# Altium PCB E1811SENSE_1.PcbDoc
Units mil, origin at the board's own origin, x right, y up, seen from the top; angles counter-clockwise.
Board outline 900 x 1630 mil, 2 copper layers (Top Layer, Bottom Layer); 43 components, 42 nets, 170 pads, 67 vias.
Unrouted connection lines stored in the file: 1.
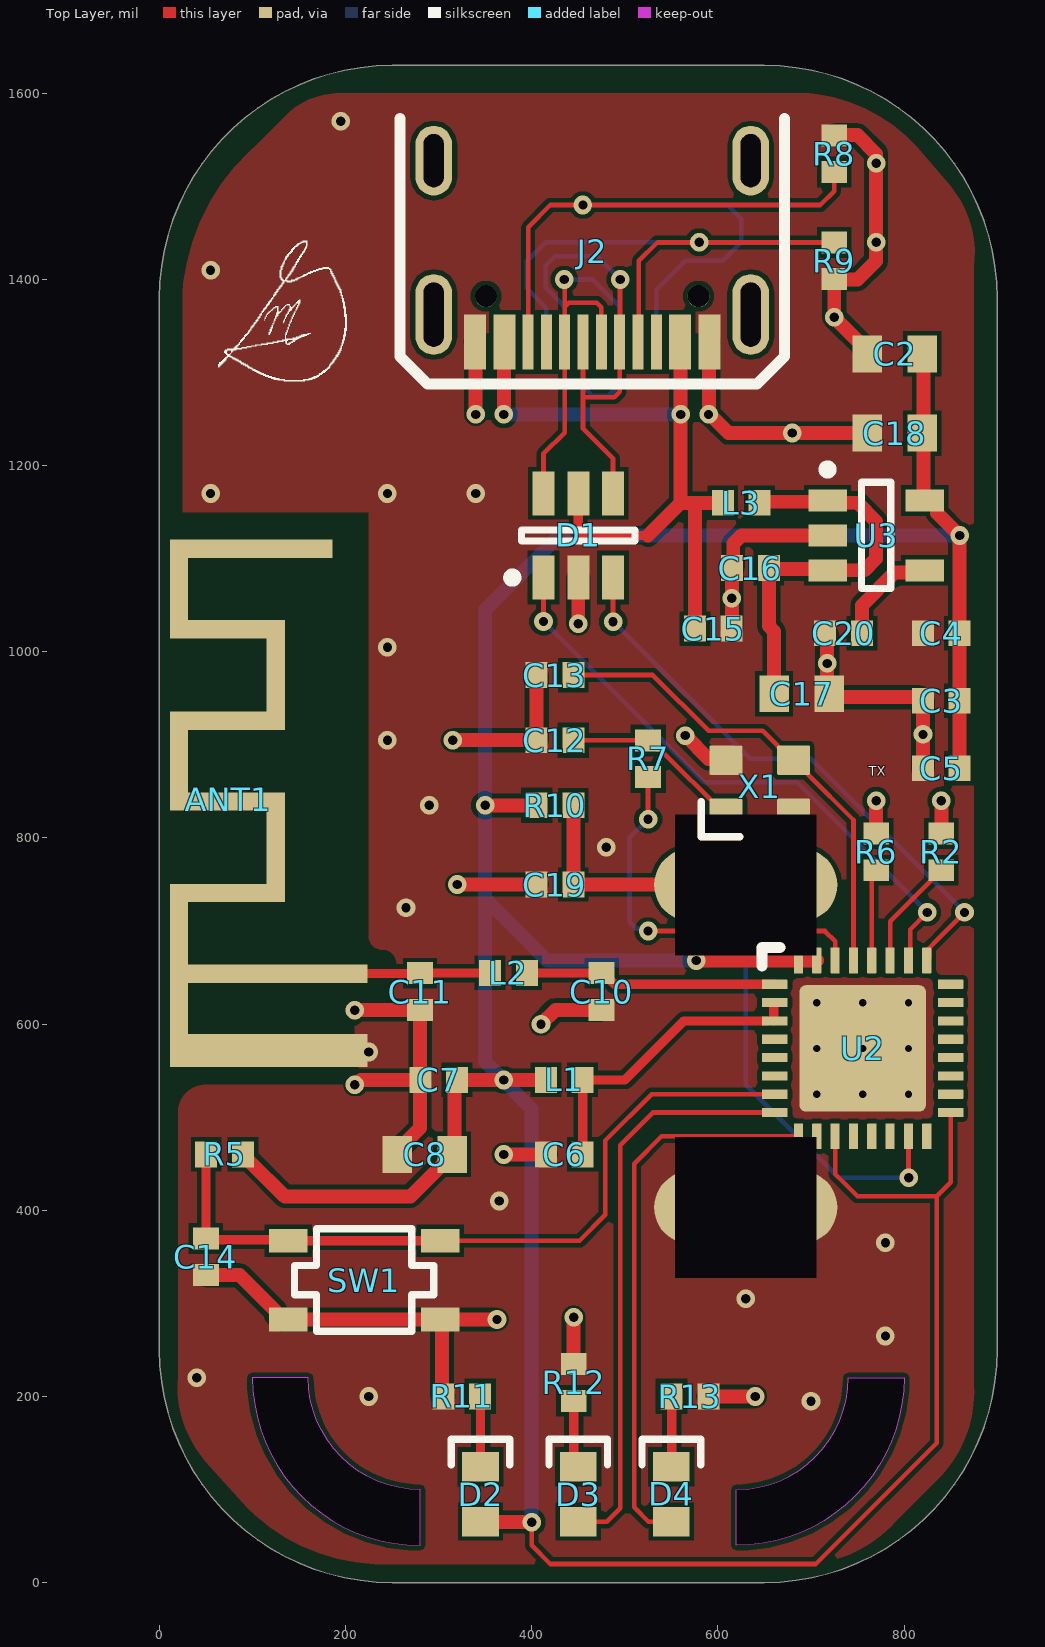
[diagram p0: Top Layer view]
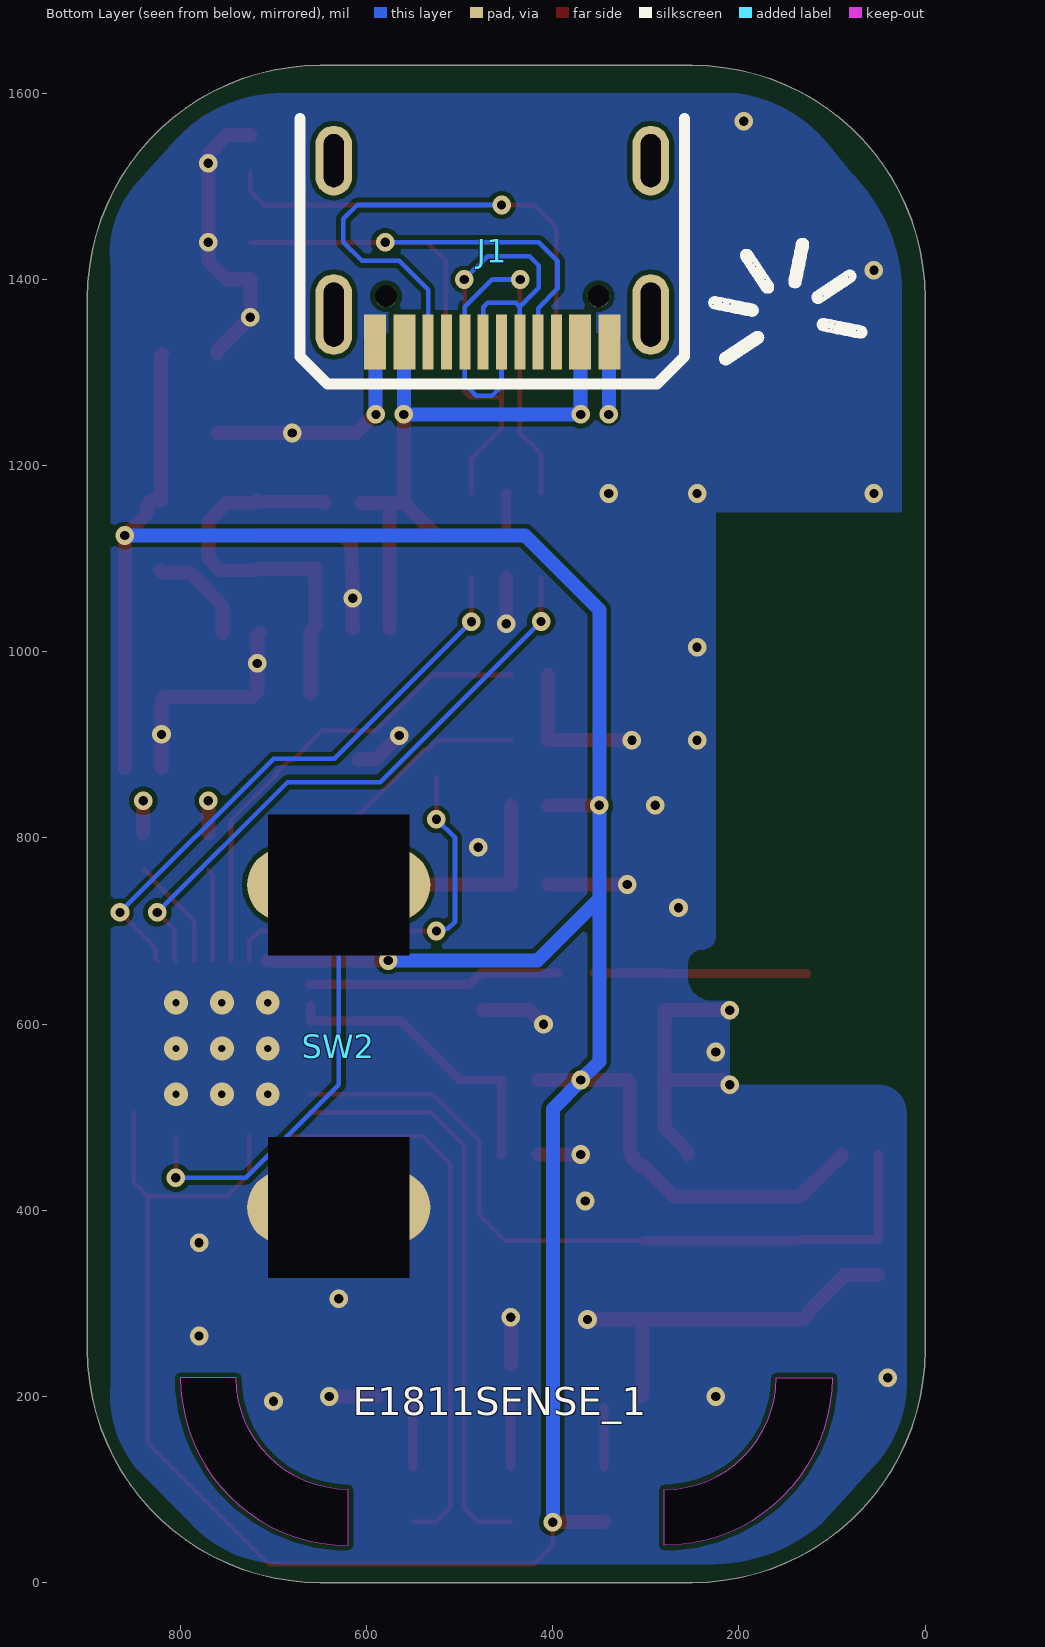
[diagram p1: Bottom Layer view, seen from below]
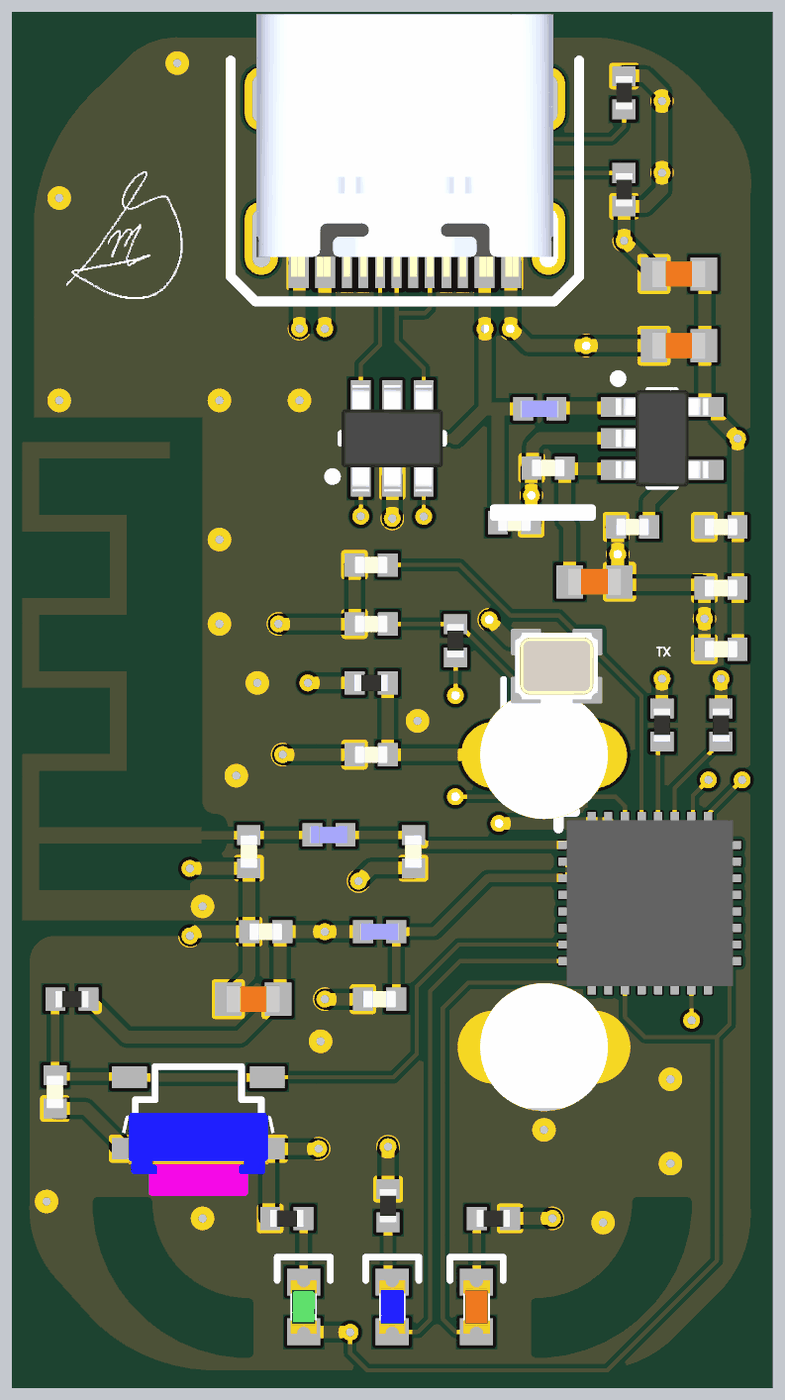
[diagram p2: 3D render of the assembled board from above, using the file's embedded part models]

## Layer stack, top to bottom
Top Solder: solder mask 0.4, Solder Resist, Dk 3.5
Top Layer: signal copper 1.4
Dielectric 1: dielectric 12.6, FR-4, Dk 4.8
Bottom Layer: signal copper 1.4
Bottom Solder: solder mask 0.4, Solder Resist, Dk 3.5

## Board outline
0,250 ccw(c250,250) 250,0 650,0 ccw(c650,250) 900,250 900,1380 ccw(c650,1380) 650,1630 250,1630 ccw(c250,1380) 0,1380 0,1385
cut-out: 280,40 280,100 cw(c280,220) 160,220 100,220 ccw(c280,220)
cut-out: 620,40 620,100 ccw(c620,220) 740,220 800,220 cw(c620,220)

## Design rules (kind name [scope] priority, off if disabled: settings)
Clearance [All] p1: gap=5 ignorepadtopadclearanceinfootprint=TRUE
Clearance Clearance_1 [All] p2: gap=10 ignorepadtopadclearanceinfootprint=FALSE except(0: Arc-Hole Track-Hole SMDPad-Hole THPad-Hole Via-Hole Fill-Hole Poly-Hole Region-Hole Text-Hole)
DiffPairsRouting [All] p1: maxlimit=10 minlimit=10 mostfreqgap=10 toplayer_minwidth=5 toplayer_maxwidth=15 toplayer_prefwidth=10 bottomlayer_minwidth=5 bottomlayer_maxwidth=15 bottomlayer_prefwidth=10 maxuncoupledlength=500
PlaneConnect [All] p1: planeconnectstyle=Direct reliefexpansion=20 reliefentries=4 reliefconductorwidth=10 reliefairgap=10
PolygonConnect [All] p1: connectstyle=Direct reliefconductorwidth=10 reliefentries=4 polygonreliefangle="90 Angle" airgapwidth=10
RoomDefinition E1811SENSE_1 [InComponentClass('E1811SENSE_1')] p1: confinementstyle=ConfineIn formatcopy=TRUE lockcomponents=FALSE outline 4365,-560 15450,-560 15450,645 4365,645
RoutingVias [All] p1: holewidth=28 width=50 viastyle="Through Hole" minholewidth=28 minwidth=50 maxholewidth=28 maxwidth=50
SolderMaskExpansion [All] p1: expansion=4 istentingtop=FALSE
Width [All] p1: maxlimit=20 minlimit=5 preferedwidth=10 checkconnectedcopper=TRUE
28 further rules are at their usual default settings.

## Classes and differential pairs
differential pair class DIFF_USB: MCU_USB_D USB_D
differential pair USB_D: +USB_D_P -USB_D_N
differential pair MCU_USB_D: +MCU_USB_D_P -MCU_USB_D_N

## Components (designator, comment, footprint, x,y, rotation, side; value= is the part's Value field where it differs from the comment)
ANT1 "PCB Antenna 2.4GHz 50Ohm" ANT_IFA_USB_2_4GHZ_50R 223.82,571.5 r90 top
C2 "10u" CAP_0603 790,1320 r0 top
C3 "100n" CAP_0402 840,947.5 r0 top
C4 "100n" CAP_0402 840,1020 r0 top
C5 "100n" CAP_0402 840,875 r0 top
C6 "100n" CAP_0402 435,460 r0 top
C7 "100n" CAP_0402 300,540 r0 top
C8 "10u" CAP_0603 285,460 r0 top
C10 "3p3" CAP_0402 475,635 r90 top
C11 "3p3" CAP_0402 280,635 r90 top
C12 "10p" CAP_0402 425,905 r0 top
C13 "10p" CAP_0402 425,975 r0 top
C14 "100n" CAP_0402 50,350 r90 top
C15 "100n" CAP_0402 595,1025 r180 top
C16 "100n" CAP_0402 635,1090 r0 top
C17 "10u" CAP_0603 690,955 r180 top
C18 "10u" CAP_0603 790,1235 r0 top
C19 "100n" CAP_0402 425,750 r0 top
C20 "100n" CAP_0402 735,1020 r0 top
D1 "USBLC6-2SC6" STM-SOT23-6L_V 450,1125 r90 top
D2 "GREEN" LED_0603_GREEN 345,95 r270 top
D3 "BLUE" LED_0603_BLUE 450,95 r270 top
D4 "RED" LED_0603_RED 550,95 r270 top
J1 "TYPE-C-31-M-12" TYPE-C-31-M-12 465,1445 r0 bottom
J2 "TYPE-C-31-M-12" TYPE-C-31-M-12 465,1445 r180 top
L1 "2n2" IND_0402 435,540 r0 top
L2 "2n2" IND_0402 375,655 r0 top
L3 "2n2" IND_0402 625,1160 r180 top
R2 "470R" RES_0402 840,785 r270 top
R5 "5k1" RES_0402 70,460 r0 top
R6 "470R" RES_0402 770,785 r270 top
R7 "22R" RES_0402 525,885 r90 top
R8 "5k1" RES_0402 725,1535 r90 top
R9 "5k1" RES_0402 725,1420 r270 top
R10 "5k1" RES_0402 425,835 r180 top
R11 "1k" RES_0402 325,200 r0 top
R12 "1k" RES_0402 445,215 r270 top
R13 "1k" RES_0402 570,200 r180 top
SW1 "SKRPANE010" SKRPANE010 220,325 r180 top
SW2 "SS-5GL111-3" SS-5GL1131-3 630,720 r180 bottom
U2 "ESP32-C3" QFN32-5x5 755.51,573.9 r0 top
U3 "SPX3819M5-L-3-3/TR" SOT-23-5 770,1125 r0 top
X1 "40MHz" XTAL_2520 645,855 r180 top

## Footprints (in the part's own frame and the unit in brackets; to place one, negate y for a bottom-side part, rotate by r counter-clockwise, add the part's x,y. Pads: shape width x height; smd on the part's side, far side on the other; paste and mask are expansions set on the pad)
ANT_IFA_USB_2_4GHZ_50R [mm]
  rect 5x0.5 smd paste-2539.97 mask+0.102: 1(2.05,5.15)
  rect 0.5x4.9 smd paste-2539.97 mask+0.102: 1(2.1,2.45)
  rect 0.5x2.64 smd paste-2539.97 mask+0.102: 1(4.3,3.58) 1(6.8,3.58) 1(9,3.58) 1(11.5,3.58)
  rect 2x0.5 smd paste-2539.97 mask+0.102: 1(5.55,2.51) 1(10.25,2.51)
  rect 2.7x0.5 smd paste-2539.97 mask+0.102: 1(7.9,5.15) 1(12.6,5.15)
  rect 0.5x3.94 smd paste-2539.97 mask+0.102: 1(13.7,2.93)
  rect 0.9x4.9 smd paste-2539.97 mask+0.102: 2(0,2.45)
CAP_0402 [mm]
  rect 0.6x0.7 smd: 1(-0.5,0) 2(0.5,0)
  body extent -0.5,-0.26 0.5,0.26, height 0.37
CAP_0603 [mm]
  rect 0.8x1 smd: 1(-0.75,0) 2(0.75,0)
  body extent -0.8,-0.4 0.8,0.4, height 0.51
IND_0402 [mm]
  rect 0.6x0.7 smd: 1(-0.5,0) 2(0.5,0)
  body extent -0.56,-0.26 0.56,0.26, height 0.67
LED_0603_BLUE [mm]
  rect 0.8x1 smd: A(0.75,0) K(-0.75,0)
  silkscreen extent -1.5,-0.8 -0.8,0.8, body extent -0.8,-0.4 0.8,0.4, height 0.6
LED_0603_GREEN [mm]
  rect 0.8x1 smd: A(0.75,0) K(-0.75,0)
  silkscreen extent -1.5,-0.8 -0.8,0.8, body extent -0.8,-0.4 0.8,0.4, height 0.6
LED_0603_RED [mm]
  rect 0.8x1 smd: A(0.75,0) K(-0.75,0)
  silkscreen extent -1.5,-0.8 -0.8,0.8, body extent -0.8,-0.4 0.8,0.4, height 0.6
QFN32-5x5 [mm]
  rrect10% 0.7x0.25 smd mask+0.05: 1(-2.4,1.75) 2(-2.4,1.25) 3(-2.4,0.75) 4(-2.4,0.25) 5(-2.4,-0.25) 6(-2.4,-0.75) 7(-2.4,-1.25) 8(-2.4,-1.75) 17(2.4,-1.75) 18(2.4,-1.25) 19(2.4,-0.75) 20(2.4,-0.25) 21(2.4,0.25) 22(2.4,0.75) 23(2.4,1.25) 24(2.4,1.75)
  rrect10% 0.25x0.7 smd mask+0.05: 9(-1.75,-2.4) 10(-1.25,-2.4) 11(-0.75,-2.4) 12(-0.25,-2.4) 13(0.25,-2.4) 14(0.75,-2.4) 15(1.25,-2.4) 16(1.75,-2.4) 25(1.75,2.4) 26(1.25,2.4) 27(0.75,2.4) 28(0.25,2.4) 29(-0.25,2.4) 30(-0.75,2.4) 31(-1.25,2.4) 32(-1.75,2.4)
  rrect10% 3.45x3.45 smd mask+0.07: 33(0,0)
  silkscreen extent -2.75,2.25 -2.25,2.75, body extent -2.5,-2.5 2.5,2.5, height 0.85
RES_0402 [mm]
  rect 0.6x0.7 smd: 1(-0.5,0) 2(0.5,0)
  body extent -0.5,-0.25 0.5,0.25, height 0.3
SKRPANE010 [mm]
  rect 1.05x0.65 smd: 12(-2.075,1.075) 12(2.075,1.075) 34(-2.075,-1.075) 34(2.075,-1.075)
  silkscreen extent -1.9,-1.4 1.9,1.4, body extent -2.3,-1.6 2.3,1.6, height 2.51
SOT-23-5 [mm] "SOT23, 5-Leads, Body 2,90x2,80mm, Pitch 0,95mm, IPC Medium Density"
  rect 1.05x0.6 smd: 1(-1.325,0.95) 2(-1.325,0) 3(-1.325,-0.95) 4(1.325,-0.95) 5(1.325,0.95)
  silkscreen extent -1.45,-1.45 0.4,1.92, body extent -1.4,-1.45 1.4,1.45, height 1.45
SS-5GL1131-3 [mm]
  oval 5x2 hole 3.84 square: 1(0,0.75) 2(0,-8.05)
  body extent -3.2,-9.9 3.32,17.8, height 11.85
STM-SOT23-6L_V [mm] "SOT23, 6-Leads, Body 3.05x1.75mm, Pitch 0.95mm"
  rect 1.2x0.6 smd: 1(-1.15,0.95) 2(-1.15,0) 3(-1.15,-0.95) 4(1.15,-0.95) 5(1.15,0) 6(1.15,0.95)
  silkscreen extent -1.27,-1.55 0.15,1.92, body extent -1.6,-1.53 1.6,1.53, height 1.45
TYPE-C-31-M-12 [mm]
  rect 0.6x1.5 smd mask+0.07: A1B12(-3.2,2.85) B1A12(3.2,2.85)
  rect 0.6x1.5 smd mask+0.14: A4B9(-2.4,2.85) B4A9(2.4,2.85)
  rect 0.3x1.5 smd mask+0.14: A5(-1.25,2.85) A6(-0.25,2.85) A7(0.25,2.85) A8(1.25,2.85) B5(1.75,2.85) B6(0.75,2.85) B7(-0.75,2.85) B8(-1.75,2.85)
  round 0.6 hole 0.6 unplated mask+0.3: MH(-2.9,1.6) MH(2.9,1.6)
  oval 1x1.9 hole 0.55 slot 1.45 at 90 deg mask+0.05: SH(-4.325,-2.1) SH(4.325,-2.1)
  oval 1x2.2 hole 0.55 slot 1.75 at 90 deg mask+0.05: SH(-4.325,2.1) SH(4.325,2.1)
  silkscreen extent -5.25,-3.25 5.25,4, body extent -4.47,-4.65 4.47,3.25, height 3.32
XTAL_2520 [mm]
  rrect10% 0.9x0.8 smd mask+0: 1(-0.925,-0.725) 2(0.925,-0.725) 3(0.925,0.725) 4(-0.925,0.725)
  silkscreen extent 0.54,0.4 1.6,1.36, body extent -1.25,-1 1.25,1, height 0.8

## Part data
ANT1: library part ANT_IFA_USB_2_4GHZ_50R, "Inverted F 2.4GHz ISM PCB Antenna 50 Ohm", ComponentLink1Description=Datasheet, ComponentLink1URL=https://www.ti.com/lit/an/swra117d/swra117d.pdf
C2 C8 C17 C18: library part CAP_0603_10V, "Capacitor SMD 0603 10V", LCSC=C19702, Manufacturer=Samsung, Manufacturer Part Number=CL10A106KP8NNNC
C3 C4 C5 C6 C7 C14 C15 C16 C19 C20: library part CAP_0402_50V, "Capacitor SMD 0402 50V", LCSC=C1525, Manufacturer=Samsung, Manufacturer Part Number=CL05B104KO5NNNC
C10 C11: library part CAP_0402_50V, "Capacitor SMD 0402 50V", LCSC=C1565, Manufacturer=FH, Manufacturer Part Number=0402CG3R3C500NT
C12 C13: library part CAP_0402_50V, "Capacitor SMD 0402 50V", LCSC=C32949, Manufacturer=Samsung, Manufacturer Part Number=CL05C100JB5NNNC
D1: library part CMP-2000-05378-1, "Very low capacitance ESD protection, 3.5 pF, -40 to 125 degC, 6-Pin SOT23, RoHS, Tape and Reel", Capacitance Value=3.5pF, Clamping Voltage=17V, LCSC=C7519, Leakage Current=0.15uA, Manufacturer=STMicroelectronics, Operating Temp Range=-40Cto125C, Operating Temperature Classification=Automotive, Operating Temperature Max Deg. C=125C, Operating Temperature Min Deg. C=-40C, Package / Case=SOT-23, Package Description="6-Pin Small Outline Transistor, Body 2.925 x 1.625 mm, Pitch 0.95 mm", Package Reference=SOT23-6L, Peak Pulse Current=5A, Reverse Breakdown Voltage=6V, Reverse Stand-off Voltage=5V, Test Current (It)=1mA, Clamping Voltage (Max)=17V, Configuration=Dual, Datasheet URL=http://www.st.com/st-web-ui/static/active/en/resource/technical/document/datasheet/CD00050750.pdf, Datasheet Version="Rev. 5, 10/2011", Direction Type=Uni-Directional, Leakage Current (Max)=0.15uA, Manufacturer URL=http://www.st.com/, Mounting=SurfaceMount, Mounting Style=SurfaceMount, Number of Elements=1, Packaging=TapeandReel, Pin Count=6, Polarity=Uni-Directional, Product Depth (mm)=1.75mm, Product Height (mm)=1.3mm, Product Length (mm)=3.05mm, Rad Hardened=No, Suppressor Type=DiodeArrays, Working Voltage=5V, Working Voltage (Max)=5V
D2: library part LED_0603_GREEN, "LED 0603 GREEN SMD", LCSC=C72043
D3: library part LED_0603_BLUE, "LED 0603 BLUE SMD"
D4: library part LED_0603_RED, "LED 0603 RED SMD"
J1 J2: "USB Type C Connector Horizontal SMT", LCSC=C165948, Manufacturer="Koren Hroparts", Manufacturer Part Number=TYPE-C-31-M-12
L1 L2 L3: library part IND_0402, "Inductor SMD 0402", LCSC=C412264, Manufacturer=Murata, Manufacturer Part Number=LQW15AN2N2G80D
R2 R6 R11 R12 R13: library part RES_0402, "Resistor SMD 0402", LCSC=C25117, Manufacturer=UNI-ROYAL, Manufacturer Part Number=0402WGF4700TCE
R5 R8 R9 R10: library part RES_0402, "Resistor SMD 0402", LCSC=C105873, Manufacturer=YAGEO, Manufacturer Part Number=RC0402JR-075K1L
R7: library part RES_0402, "Resistor SMD 0402", LCSC=C25092, Manufacturer=UNI-ROYAL, Manufacturer Part Number=0402WGF220JTCE
SW1: "Tactile Switch SMD SPST", LCSC=C470426, Manufacturer="Alps Alpine", Manufacturer Part Number=SKRPANE010
U2: "Ultra­Low­Power SoC with RISC­V Single­Core CPU Supporting IEEE 802.11b/g/n (2.4 GHz Wi­Fi) and Bluetooth® 5 (LE)", LCSC=C2838500, Manufacturer=Espressif, Manufacturer Part Number=ESP32-C3
U3: "500mA +3.3V Low-Noise LDO Voltage Regulator", LCSC=C9055, Manufacturer=MaxLinear, Manufacturer Part Number=SPX3819M5-L-3-3/TR
X1: library part XTAL_2520, "Crystal SMD 2520", LCSC=C255973, Manufacturer="Seiko Epson", Manufacturer Number=Q24FA20H0020900, Frequency=40MHz

## Via types
v1: diameter 20, hole 10, Top Layer to Bottom Layer, 58 vias
v2: diameter 25.59, hole 7.87, Top Layer to Bottom Layer, tented both sides, 9 vias

## Nets (pads, with @x,y where several pads share a name; then routed paths per layer and width w, separated by ;. In a path a pad name is that pad's centre, name@x,y a point inside that pad or via, vN(x,y) a via of type N, cw(c..) or ccw(c..) an arc to the next point about the centre after c; other vN are vias at no path point)
+3V3: C2.2 C3.2 C4.2 C5.2 C7.2 C8.2 C18.2 D2.A L1.1 R5.2 R10.2 U2.11 U2.17 U2.31 U2.32 U3.5 | length 3990.9
  Top Layer w5: v1(400,65) 400,40 420,20 705,20 835,150 835,415 ; U2.11 725.98,439.02 750,415 835,415 ; U2.17 850,430 835,415
  Top Layer w15: R5.2 89.69,458.03 94,453.72 95.96,453.72 134.69,415 269.53,415 302.34,447.81 306.28,447.81 314.53,456.06 C8.2 317.11,462.58 317.11,537.42 C7.2 v1(370,540) L1.1 ; D2.A 345.24,65.24 399.76,65.24 v1(400,65) ; v1(350,835) R10.2 ; v1(576.61,668.39) U2.32 U2.31 ; C2.2 820.85,1318.68 820.85,1235 820.85,1163.72 U3.5 831.02,1162.4 835.33,1158.09 835.33,1149.23 v1(859.69,1124.88) C4.2 C3.2 C5.2
  Bottom Layer w15: v1(400,65) 400,508.65 370,538.65 v1(370,540) 350,560 350,735 ; v1(576.61,668.39) 416.61,668.39 350,735 ; v1(859.69,1124.88) 859.57,1125 430,1125 350,1045 v1(350,835) 350,735
+3V3_RF: C6.2 L1.2 U2.2 U2.3 | length 320.3
  Top Layer w10: C6.2 L1.2 500,540 563.43,603.43 U2.3@652.24,603.43 ; U2.3@660,603.43 U2.2@660,619.87
+VBUS: C15.2 D1.5 J1.A4B9 J1.B4A9 J2.A4B9 J2.B4A9 L3.2 | length 945.9
  Top Layer w5: J2.B4A9@370,1332.28 J2.B4A9
  Top Layer w10: D1.5 450,1130.86 455.86,1125 525,1125 ; J2.A4B9 J2.A4B9@559.74,1332.54 ; v1@559.74,1255.26 v1(560,1255)
  Top Layer w15: v1(370,1255) J2.B4A9@370,1332.28 ; 525,1125 560,1160 ; v1@559.74,1255.26 J2.A4B9@559.74,1332.54 ; v1(560,1255) 560,1160 ; C15.2 575.31,1154.69 570,1160 ; L3.2 570,1160 ; 560,1160 570,1160
  Bottom Layer w15: J1.A4B9 370.26,1332.54 370.26,1255.26 v1(370,1255) v1(560,1255) 559.74,1255.26 559.74,1332.54 J1.B4A9
+VBUS_FILT: C16.2 C17.2 L3.1 U3.1 U3.3 | length 432.5
  Top Layer w15: L3.1 645.89,1161.2 716.63,1161.2 U3.1 720.1,1160.13 749.87,1160.13 770,1140 770,1100 757.6,1087.6 U3.3 716.63,1088.8 655.89,1088.8 C16.2 ; C16.2@659,1086.28 654.69,1081.97 654.69,1027.47 660.47,1021.68 C17.2
+VCC_SPI: U2.18
ANT_RF: ANT1.1 C11.2 L2.1 | length 228.3
  Top Layer w10: ANT1.1@127.36,654.17 127.62,654.43 279.74,654.43 C11.2 280.16,654.84 355.16,654.84 L2.1
CHIP_EN: C14.2 R5.1 SW1.34 U2.7 | length 814.5
  Top Layer w5: SW1.34@301.69,367.32 451.36,367.32 479.04,395 479.04,475 528.72,524.68 U2.7
  Top Layer w10: R5.1 50.16,459.84 50.16,369.84 C14.2 51.18,368.5 137.13,368.5 138.31,367.32 SW1.34@301.69,367.32
FSPI_CLK: 
FSPI_D: U2.13
FSPI_NCS: U2.16
FSPI_NCS2: U2.14
FSPI_Q: U2.6
GND: ANT1.2 C2.1 C3.1 C4.1 C5.1 C6.1 C7.1 C8.1 C10.1 C11.1 C12.1 C13.1 C14.1 C15.1 C16.1 C17.1 C18.1 C19.1 C20.1 D1.2 J1.A1B12 J1.B1A12 J2.A1B12 J2.B1A12 R8.2 R9.2 R11.1 R12.1 R13.1 SW1.12 SW2.2 U2.33 U3.2 X1.2 X1.4 | length 2542.5
  Top Layer w15: C14.1 86.28,330.32 125.14,291.46 125.14,287.97 130.43,282.68 138.31,282.68 SW1.12@301.69,282.68 ; v1(210,535) 211.35,535 216.35,540 C7.1 ; v1(210,615) 210.16,615.16 279.84,615.16 C11.1 280.16,615.16 280.16,540.16 C7.1 ; C8.1 255.47,463.94 280,488.46 280,539.68 C7.1 ; R11.1 303.5,201.81 303.5,280.87 SW1.12@301.69,282.68 ; v1(315,905) C12.1 C13.1 ; v1(320,750) C19.1 ; J2.B1A12 339.51,1332.3 339.51,1255.49 v1(340,1255) ; v1(362.68,282.68) SW1.12@301.69,282.68 ; v1(370,460) C6.1 ; v1(410,600) 425.32,615.32 C10.1 ; R12.1 v1(445,285) ; v1(450,1030) D1.2 ; v1(565,910) 590,885 607.13,885 X1.2 ; R13.1 v1(640,200) ; J2.A1B12 590.49,1332.3 590.49,1255.49 v1(590,1255) 591.35,1255 611.35,1235 C18.1 ; C15.1 615,1025.32 v1(615,1057.5) 615,1089.68 616.51,1091.2 616.51,1116.21 625.3,1125 U3.2 ; C20.1 717.42,1017.89 v1(717.42,987.5) 717.42,957.11 C17.1 723.28,951.25 816.57,951.25 C3.1 v1(820.32,911.25) C5.1 ; R8.2 725.31,1555 750,1555 770,1535 770,1420 750,1400 725.31,1400 R9.2 v1(725,1359.41) 760.47,1323.94 C2.1
  Bottom Layer w15: J1.A1B12 339.51,1332.3 339.51,1255.49 v1(340,1255) ; v1(590,1255) 590.49,1255.49 590.49,1332.3 J1.B1A12
  other v1: 700,195 225,200 40,220 780,265 630,305 780,365 365,410 225,570 265,725 480,790 290,835 245,905 245,1005 55,1170 245,1170 340,1170 680,1235 55,1410 770,1440 770,1525 195,1570
  other v2: 706.3,524.68 755.51,524.68 804.72,524.68 706.3,573.9 755.51,573.9 804.72,573.9 706.3,623.11 755.51,623.11 804.72,623.11
GPIO9: C19.2 R10.1 SW2.1 U2.15 | length 746
  Top Layer w5: U2.15 804.86,479.27 804.86,435.14 v1(805,435)
  Top Layer w15: R10.1 C19.2 444.92,749.76 629.76,749.76 SW2.1
  Bottom Layer w5: SW2.1 630,535 730,435 v1(805,435)
INT_ACC: U2.10
LDO_BYP: C20.2 U3.4 | length 112.9
  Top Layer w15: C20.2 754.69,1049.69 790,1085 819.57,1085 U3.4
LED_3V3_K: D2.K R11.2 | length 63.2
  Top Layer w10: D2.K R11.2@345,187.72
LED_A: D3.A U2.8 | length 626.5
  Top Layer w5: D3.A@445,65.47 480.47,65.47 495,80 495,470 530,505 U2.8
LED_A_K: D3.K R12.2 | length 70.8
  Top Layer w10: D3.K@445,124.53 R12.2
LED_B: D4.A U2.9 | length 604.3
  Top Layer w5: D4.A 525.47,65.47 510,80.94 510,450 539.41,479.41 U2.9
LED_B_K: D4.K R13.2 | length 75.6
  Top Layer w10: D4.K 550.31,124.84 R13.2
LNA_IN: C10.2 L2.2 U2.1 | length 271.4
  Top Layer w10: L2.2 394.84,654.84 474.84,654.84 C10.2 476.97,654.69 488.86,642.8 U2.1
MCU_FSPICLK: U2.12
MCU_UART0_RX: R2.2 U2.27 | length 120.8
  Top Layer w5: U2.27 785.04,710.35 828.72,754.04 828.72,756 838.03,765.31 R2.2
MCU_UART0_TX: R6.2 U2.28 | length 98.9
  Top Layer w5: U2.28 765.35,760.67 R6.2
MCU_USB_D_N: D1.3 U2.25 | length 622.7
  Top Layer w5: v1(487.4,1032.4) D1.3 ; U2.25 826.83,670.81 826.83,681.69 836.83,691.69 836.83,691.83 v1(865,720)
  Bottom Layer w5: v1(487.4,1032.4) 634.8,885 700,885 v1(865,720)
MCU_USB_D_P: D1.1 U2.26 | length 649
  Top Layer w5: v1(412.6,1032.6) D1.1 ; U2.26 806.65,670.31 806.65,701.65 v1(825,720)
  Bottom Layer w5: v1(412.6,1032.6) 585.2,860 685,860 v1(825,720)
SPI_CLK: U2.22
SPI_DI: U2.23
SPI_DO: U2.24
SPI_NCS: U2.21
SPI_NHLD: U2.19
SPI_NWP: U2.20
UART0_RX: R2.1 | length 35.3
  Top Layer w15: R2.1 v1(840,840)
UART0_TX: R6.1 | length 35.3
  Top Layer w15: R6.1 v1(770,840)
USB_A5: J1.A5 J2.A5 R9.1 | length 594.8
  Top Layer w5: J2.A5 515,1333.58 515,1420 534.68,1439.68 R9.1
  Bottom Layer w5: J1.A5 415.79,1369.21 395,1390 395,1420 415,1440 v1(580,1440)
USB_B5: J1.B5 J2.B5 R8.1 | length 858.2
  Top Layer w5: J2.B5 396.1,1456.1 420,1480 v1(455,1480) 710,1480 725,1495 R8.1
  Bottom Layer w5: v1(455,1480) 610,1480 625,1465 625,1440 605,1420 565,1420 533.9,1388.9 J1.B5
USB_D_N: D1.4 J1.A7 J1.B7 J2.A7 J2.B7 | length 605.5
  Top Layer w5: J2.A7@456.06,1333.7 J2.A7 455.16,1273.56 ; D1.4 487.4,1207.6 455.16,1239.84 455.16,1273.56 ; v1(495,1400) 494.76,1399.76 494.76,1333.03 J2.B7 494.53,1279.53 488.56,1273.56 455.16,1273.56
  Bottom Layer w5: J1.B7 435.47,1370.47 ; J1.A7 474.84,1370.16 470,1375 440,1375 435.47,1370.47 ; v1(495,1400) 470,1425 425,1425 415,1415 415,1390.94 435.47,1370.47
USB_D_P: D1.6 J1.A6 J1.B6 J2.A6 J2.B6 | length 571.2
  Top Layer w5: D1.6 412.6,1212.6 435.47,1235.47 J2.B6 435.47,1370.47 ; v1(435,1400) 435.47,1399.53 435.47,1370.47 ; J2.A6 474.84,1370.16 470,1375 440,1375 435.47,1370.47
  Bottom Layer w5: v1(435,1400) 465,1400 494.53,1370.47 J1.B6 494.53,1287.46 482.07,1275 465.32,1275 455.16,1285.16 J1.A6
XTAL_IN: C12.2 R7.2 X1.3 | length 196.4
  Top Layer w5: C12.2 524.69,905 R7.2 534.31,895.37 537.7,895.37 606.61,826.46 X1.3
XTAL_N: C13.2 U2.29 X1.1 | length 517.5
  Top Layer w5: C13.2 530,975 590,915 647.99,915 679.45,883.54 X1.1 683.39,883.54 696.63,870.3 696.63,868.33 745.67,819.29 U2.29
XTAL_P: R7.1 U2.30 | length 413.9
  Top Layer w5: v1(525,700) 715,700 725.98,689.02 U2.30 ; v1(525,820) R7.1
  Bottom Layer w5: v1(525,700) 522.63,702.37 512.63,702.37 505,710 505,800 v1(525,820)
pads on no net: J1.A8 J1.B8 J1.MH J1.SH J2.A8 J2.B8 J2.MH J2.SH U2.4 U2.5

## Polygon pours and split planes (outlines as drawn)
GND on Top Layer "GND_L01_P001" (solid, pour order 1): 201.42,1600 ccw(c194.85,1515.89) 140,1580 105,1545 ccw(c260,1367.5) 25,1385 25,1150 225,1150 225,695 ccw(c240,695) 240,680 cw(c240,665) 255,665 255,650 cw(c230.01,649.99) 230,625 210,625 210,605 ccw(c215,605) 215,600 210,600 210,545 cw(c200,545) 200,535 50,535 ccw(c49.99,505.01) 20,505 20,220 ccw(c143.45,211.15) 50,130 95,80 ccw(c240.64,226.75) 241.42,20 695,20 ccw(c688.18,157.17) 790,65 840,115 ccw(c741.13,205.45) 875,211.42 875,1405 875,1415 ccw(c759.93,1427.33) 850,1500 820,1535 ccw(c680.87,1421.01) 698.58,1600 230,1600
GND on Bottom Layer "GND_L02_P002" (solid, pour order 2): 201.42,1600 ccw(c223.11,1447.62) 100,1540 80,1515 ccw(c209.41,1383.62) 25,1385 25,1150 225,1150 225,695 ccw(c240,695) 240,680 cw(c240,665) 255,665 255,650 cw(c230.01,649.99) 230,625 210,625 210,545 cw(c200,545) 200,535 50,535 ccw(c49.99,505.01) 20,505 20,220 ccw(c152.17,214.75) 55,125 110,65 ccw(c230.03,201.15) 241.42,20 695,20 ccw(c688.18,157.17) 790,65 845,120 ccw(c749.66,201.92) 875,211.42 875,1405 875,1415 ccw(c759.93,1427.33) 850,1500 805,1550 ccw(c691.46,1446.6) 698.58,1600 230,1600

## Silkscreen, mask and mechanical layers (free items; w line width, h text height)
Top Overlay:
  region: 431 vertices and 5 holes, not listed, extent 63.38,1290.44 201.32,1441.76
  text "TX" at 762,867 h10
Bottom Overlay:
  drawing of 6 lines, arcs and shapes, not listed
  text "E1811SENSE_1" at 615,180 h30
Mechanical 1:
  lines w10: 0,1380 cw(c250,1380) 250,1630 645,1630 ; 0,1385 0,250 ccw(c250,250) 250,0 650,0 ccw(c650,250) 900,250 900,1380 ccw(c650,1380) 650,1630 ; 100,220 ccw(c280,220) 280,40 280,100 cw(c280,220) 160,220 100,220 ; 620,40 ccw(c620,220) 800,220 740,220 cw(c620,220) 620,100 620,40

## Text inside footprints (layer, text, board x,y; h text height)
D2: Mechanical 13 "+" at 368.96,43.16 h19.68 r270
D3: Mechanical 13 "+" at 473.96,43.16 h19.68 r270
D4: Mechanical 13 "+" at 573.96,43.16 h19.68 r270